# EAGLE board source_eagle (EAGLE 9.2.0)
REV: B
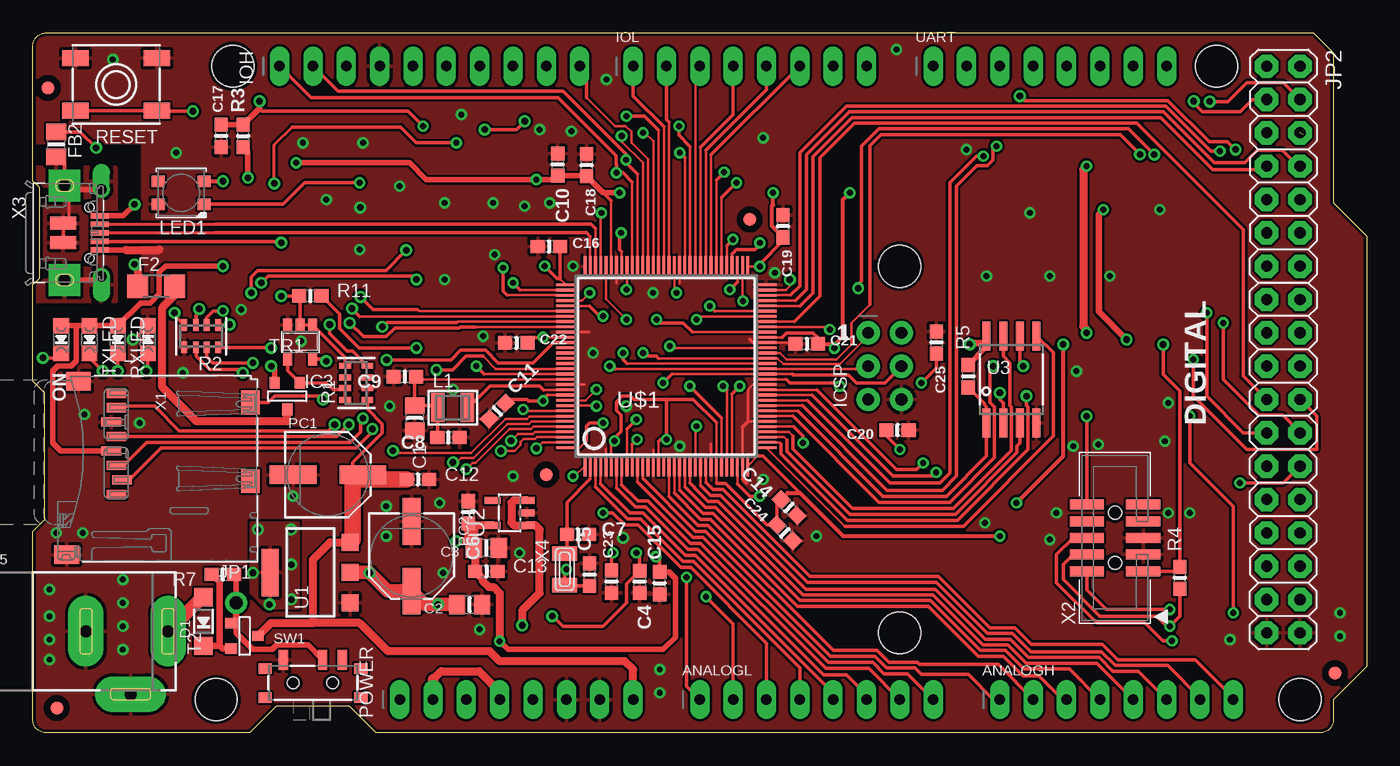
[diagram p0: board, top side]
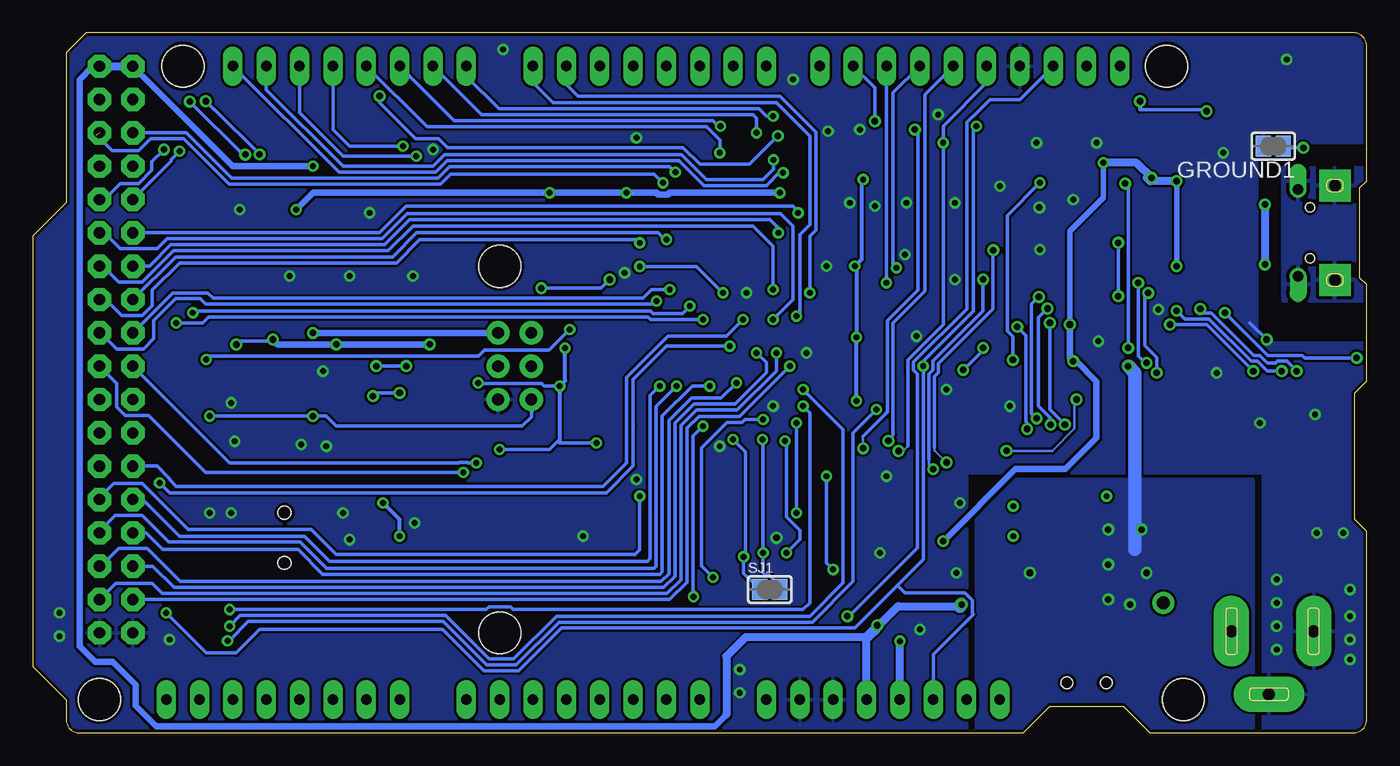
[diagram p1: board, bottom side, seen from below]

Size 101.6 x 53.34 mm. Coordinates in mm from the lower left corner, seen from the top.
Outline: 97.54,53.34 99.06,51.82 99.06,40.39 101.6,37.85 101.6,5.08 99.06,2.54 99.06,1 arc-90 98.06,0 26.16,0 24.13,2.03 18.54,2.03 16.51,0 1,0 arc-90 0,1 0,15.37 0.89,16.26 0.89,25.91 0,26.8 0,34.16 0.51,34.67 0.51,41.53 0,42.04 0,52.34 arc-90 1,53.34 97.54,53.34
Copper layers (1*16): Top 0.035mm / dielectric 1.5mm / Bottom 0.035mm
Design rules "adafruit *": minimum track width 7mil, minimum drill 15.5mil, track to track 7mil, track to pad 7mil, pad to pad 7mil, via to via 7mil, smd to smd 7mil, copper to edge 10mil, drill to drill 8mil, minimum pad ring 10mil, minimum via ring 8mil, stop-mask expansion 2mil, vias tented up to drill 20mil, thermal gap 10mil
Holes 3.2 mm at 66.04,35.56 66.04,7.62 15.24,50.8 13.97,2.54 96.52,2.54 90.17,50.8

## Footprints (pad centres in the part's own frame; a part is rotated, then mirrored left to right if it is on the bottom)
1X08_OVALWAVE = drill 0.8 pad 1.5 long: 1 -8.89,0; 2 -6.35,0; 3 -3.81,0; 4 -1.27,0; 5 1.27,0; 6 3.81,0; 7 6.35,0; 8 8.89,0
0805-NO = smd 1.24 x 1.5: 1 -0.95,0; 2 0.95,0
0603-NO = smd 1.075 x 1: 1 -0.85,0; 2 0.85,0
SOD-123 = smd 1.4 x 1.4: A 1.85,0; C -1.85,0
R1206 = smd 1.6 x 1.803: 1 -1.422,0; 2 1.422,0
FIDUCIAL_1MM = smd 1 x 1: 1 0,0
SOLDERJUMPER_CLOSEDWIRE = smd 1.168 x 1.6: 1 -0.762,0; 2 0.762,0 | smd 0.635 x 0.203: WIRE 0,0
SOT23-5 = smd 0.69 x 0.99: 1 -0.95,-1.29; 2 0,-1.29; 3 0.95,-1.29; 4 0.95,1.3; 5 -0.95,1.3
2X03_ROUND_70MIL = drill 0.9 pad 1.778: 1 -2.54,-1.27; 2 -2.54,1.27; 3 0,-1.27; 4 0,1.27; 5 2.54,-1.27; 6 2.54,1.27
1X10_OVALWAVE = drill 0.8 pad 1.5 long: 1 -11.43,0; 2 -8.89,0; 3 -6.35,0; 4 -3.81,0; 5 -1.27,0; 6 1.27,0; 7 3.81,0; 8 6.35,0; 9 8.89,0; 10 11.43,0
1X01_ROUND = drill 1 pad 1.676: 1 0,0
2X18_THICKWAVE = drill 0.85 pad 1.778 octagon: 1 -21.59,-1.27; 2 -21.59,1.27; 3 -19.05,-1.27; 4 -19.05,1.27; 5 -16.51,-1.27; 6 -16.51,1.27; 7 -13.97,-1.27; 8 -13.97,1.27; 9 -11.43,-1.27; 10 -11.43,1.27; 11 -8.89,-1.27; 12 -8.89,1.27; 13 -6.35,-1.27; 14 -6.35,1.27; 15 -3.81,-1.27; 16 -3.81,1.27; 17 -1.27,-1.27; 18 -1.27,1.27; 19 1.27,-1.27; 20 1.27,1.27; 21 3.81,-1.27; 22 3.81,1.27; 23 6.35,-1.27; 24 6.35,1.27; 25 8.89,-1.27; 26 8.89,1.27; 27 11.43,-1.27; 28 11.43,1.27; 29 13.97,-1.27; 30 13.97,1.27; 31 16.51,-1.27; 32 16.51,1.27; 33 19.05,-1.27; 34 19.05,1.27; 35 21.59,-1.27; 36 21.59,1.27
CHIPLED_0805_NOOUTLINE = smd 1.2 x 1.2: A 0,-1.05; C 0,1.05
INDUCTOR_1007 = smd 1.016 x 2.2: P$1 -1.127,0; P$2 1.127,0
LED3535 = smd 1 x 0.85: 1 -1.75,0.875; 2 -1.75,-0.875; 3 1.75,-0.875; 4 1.75,0.875
PANASONIC_D = smd 3.556 x 1.4: + 2.654,0; - -2.654,0
RESPACK_4X0603 = smd 0.45 x 0.9: 1 -1.3,-0.85; 2 -0.4,-0.85; 3 0.4,-0.85; 4 1.3,-0.85; 5 1.3,0.85; 6 0.4,0.85; 7 -0.4,0.85; 8 -1.3,0.85
EVQ-Q2_SMALLER = smd 2 x 1.2: A -3.1,-2; A' 3.1,-2; B -3.1,2; B' 3.1,2
SPDT_SMT_SSSS811101 = smd 0.7 x 1.5: A -2.25,1.75; B 0.75,1.75; C 2.25,1.75 | smd 1 x 0.8: SUP1 -3.65,1.1; SUP2 -3.65,-1.1; SUP3 3.65,1.1; SUP4 3.65,-1.1 | hole 0.9: -1.5,0; 1.5,0
SOT-23 = smd 0.787 x 0.889: 1 0.025,-1.016; 2 -0.94,1.016; 3 0.991,1.016
SOT223-R = smd 1.3 x 1.3: 1 -2.3,-3.05; 2 0,-3.05; 3 2.3,-3.05 | smd 3.6 x 1.3: 4 0,3.05
SOT23-DBV = smd 0.55 x 1.2: 1 -0.95,-1.3; 2 0,-1.3; 3 0.95,-1.3; 4 0.95,1.3; 5 -0.95,1.3
SOIC8_208MIL = smd 0.6 x 2.2: 1 -1.905,-3.315; 2 -0.635,-3.315; 3 0.635,-3.315; 4 1.905,-3.315; 5 1.905,3.315; 6 0.635,3.315; 7 -0.635,3.315; 8 -1.905,3.315
SQFP-S-14X14-128 = smd 0.2 x 1.6: 1 -6.2,-7.6; 2 -5.8,-7.6; 3 -5.4,-7.6; 4 -5,-7.6; 5 -4.6,-7.6; 6 -4.2,-7.6; 7 -3.8,-7.6; 8 -3.4,-7.6; 9 -3,-7.6; 10 -2.6,-7.6; 11 -2.2,-7.6; 12 -1.8,-7.6; 13 -1.4,-7.6; 14 -1,-7.6; 15 -0.6,-7.6; 16 -0.2,-7.6; 17 0.2,-7.6; 18 0.6,-7.6; 19 1,-7.6; 20 1.4,-7.6; 21 1.8,-7.6; 22 2.2,-7.6; 23 2.6,-7.6; 24 3,-7.6; 25 3.4,-7.6; 26 3.8,-7.6; 27 4.2,-7.6; 28 4.6,-7.6; 29 5,-7.6; 30 5.4,-7.6; 31 5.8,-7.6; 32 6.2,-7.6; 65 6.2,7.6; 66 5.8,7.6; 67 5.4,7.6; 68 5,7.6; 69 4.6,7.6; 70 4.2,7.6; 71 3.8,7.6; 72 3.4,7.6; 73 3,7.6; 74 2.6,7.6; 75 2.2,7.6; 76 1.8,7.6; 77 1.4,7.6; 78 1,7.6; 79 0.6,7.6; 80 0.2,7.6; 81 -0.2,7.6; 82 -0.6,7.6; 83 -1,7.6; 84 -1.4,7.6; 85 -1.8,7.6; 86 -2.2,7.6; 87 -2.6,7.6; 88 -3,7.6; 89 -3.4,7.6; 90 -3.8,7.6; 91 -4.2,7.6; 92 -4.6,7.6; 93 -5,7.6; 94 -5.4,7.6; 95 -5.8,7.6; 96 -6.2,7.6 | smd 1.6 x 0.2: 33 7.6,-6.2; 34 7.6,-5.8; 35 7.6,-5.4; 36 7.6,-5; 37 7.6,-4.6; 38 7.6,-4.2; 39 7.6,-3.8; 40 7.6,-3.4; 41 7.6,-3; 42 7.6,-2.6; 43 7.6,-2.2; 44 7.6,-1.8; 45 7.6,-1.4; 46 7.6,-1; 47 7.6,-0.6; 48 7.6,-0.2; 49 7.6,0.2; 50 7.6,0.6; 51 7.6,1; 52 7.6,1.4; 53 7.6,1.8; 54 7.6,2.2; 55 7.6,2.6; 56 7.6,3; 57 7.6,3.4; 58 7.6,3.8; 59 7.6,4.2; 60 7.6,4.6; 61 7.6,5; 62 7.6,5.4; 63 7.6,5.8; 64 7.6,6.2; 97 -7.6,6.2; 98 -7.6,5.8; 99 -7.6,5.4; 100 -7.6,5; 101 -7.6,4.6; 102 -7.6,4.2; 103 -7.6,3.8; 104 -7.6,3.4; 105 -7.6,3; 106 -7.6,2.6; 107 -7.6,2.2; 108 -7.6,1.8; 109 -7.6,1.4; 110 -7.6,1; 111 -7.6,0.6; 112 -7.6,0.2; 113 -7.6,-0.2; 114 -7.6,-0.6; 115 -7.6,-1; 116 -7.6,-1.4; 117 -7.6,-1.8; 118 -7.6,-2.2; 119 -7.6,-2.6; 120 -7.6,-3; 121 -7.6,-3.4; 122 -7.6,-3.8; 123 -7.6,-4.2; 124 -7.6,-4.6; 125 -7.6,-5; 126 -7.6,-5.4; 127 -7.6,-5.8; 128 -7.6,-6.2
MICROSD = smd 0.7 x 1.5: 1 9,-10.64; 2 7.9,-10.24; 3 6.8,-10.64; 4 5.7,-11.04; 5 4.6,-10.64; 6 3.5,-11.04; 7 2.4,-10.64; 8 1.3,-10.64 | smd 1.8 x 1.4: CD1 2,-0.44; CD2 8,-0.44 | smd 1.4 x 1.9: MT1 0.4,-13.54; MT2 13.6,-14.44
2X05_1.27MM_BOX_POSTS = smd 0.76 x 2.6: 1 -2.54,-2.15; 2 -2.54,2.15; 3 -1.27,-2.15; 4 -1.27,2.15; 5 0,-2.15; 6 0,2.15; 7 1.27,-2.15; 8 1.27,2.15; 9 2.54,-2.15; 10 2.54,2.15 | hole 1: -1.905,0; 1.905,0
4UCONN_20329_V2 = smd 1 x 2: BASE@1 -0.75,-2; BASE@2 0.75,-2 | smd 0.4 x 1.35: D+ 0,0.775; D- -0.65,0.775; GND 1.3,0.775; ID 0.65,0.775; VBUS -1.3,0.775 | drill 0.8 pad 1.143 offset: SPRT@1 -3.3,0.9; SPRT@2 3.3,0.9 | drill 0.9 pad 2.413 square: SPRT@3 -3.6,-1.9; SPRT@4 3.6,-1.9 | hole 0.7: -1.95,0; 1.95,0
XTAL3215 = smd 1.1 x 1.9: P$1 1.2,0; P$2 -1.2,0
DCJACK_2MM_PTH = drill 0.9 pad 2.7 long: GND 7.35,0; GNDBREAK 10.75,-4.8; PWR 13.6,0

## Placement (x,y rotation side)
ANALOGH  20610  [1X08_OVALWAVE]  82.55,2.54 0 top
ANALOGL  20610  [1X08_OVALWAVE]  59.69,2.54 0 top
C1  10uF  [0805-NO]  29.09,23.98 270 top
C2  10uF  [0805-NO]  33.27,9.78 180 top
C3  10uF  [0805-NO]  34.54,14.1 180 top
C4  .1u  [0603-NO]  46.23,11.51 270 top
C5  22pF  [0603-NO]  42.42,12.06 90 top
C6  .1u  [0603-NO]  33.17,16.8 270 top
C7  22pF  [0603-NO]  41.53,15.11 0 top
C8  .1u  [0603-NO]  31.67,22.5 180 top
C9  1uF  [0603-NO]  28.34,27.14 180 top
C10  .1u  [0603-NO]  39.98,43.3 270 top
C11  .1u  [0603-NO]  35.38,24.53 45 top
C12  0.1uF  [0603-NO]  29.34,19.3 0 top
C13  0.1uF  [0603-NO]  34.54,12.32 0 top
C14  .1u  [0603-NO]  57.6,17.17 135 top
C15  .1u  [0603-NO]  47.75,11.4 90 top
C16  .1u  [0603-NO]  39.32,37.06 0 top
C17  0.1uF  [0603-NO]  14.35,45.49 90 top
C18  .1u  [0603-NO]  42.19,43.26 270 top
C19  .1u  [0603-NO]  57.15,38.61 270 top
C20  .1u  [0603-NO]  65.86,23.06 180 top
C21  .1u  [0603-NO]  58.95,29.64 0 top
C22  .1u  [0603-NO]  36.83,29.72 0 top
C23  .1u  [0603-NO]  44.07,11.53 90 top
C24  .1u  [0603-NO]  57.28,15.24 135 top
C25  .1u  [0603-NO]  68.83,29.74 270 top
D1  MBR120  [SOD-123]  13,8.48 90 top
F2  500mA  [R1206]  9.4,34.04 0 top
FB2  FERRITE  [0805-NO]  1.78,44.83 270 top
FD1  FIDUCIAL_1MM  [FIDUCIAL_1MM]  1.14,49.15 0 top
FD2  FIDUCIAL_1MM  [FIDUCIAL_1MM]  99.18,4.55 0 top
FD3  FIDUCIAL_1MM  [FIDUCIAL_1MM]  1.82,1.89 0 top
FD4  FIDUCIAL_1MM  [FIDUCIAL_1MM]  39.12,19.68 0 top
FD5  FIDUCIAL_1MM  [FIDUCIAL_1MM]  54.61,39.12 0 top
GROUND1  [SOLDERJUMPER_CLOSEDWIRE]  7.11,44.7 180 bottom
IC3  74LVC1G125D  [SOT23-5]  20.37,29.79 180 top
ICSP  3x2 M  [2X03_ROUND_70MIL]  64.9,27.94 270 top
IOH  20611  [1X10_OVALWAVE]  30.23,50.8 0 top
IOL  20610  [1X08_OVALWAVE]  54.61,50.8 0 top
JP1  [1X01_ROUND]  15.49,9.91 0 top
JP2  [2X18_THICKWAVE]  95.25,29.21 270 top
L  RED  [CHIPLED_0805_NOOUTLINE]  8.76,29.97 0 top
L1  10uH  [INDUCTOR_1007]  31.98,24.79 0 top
LED1  WS2812B3535  [LED3535]  11.3,41.15 180 top
ON  GREEN  [CHIPLED_0805_NOOUTLINE]  2.16,29.97 180 top
PC1  47uF/25V  [PANASONIC_D]  22.48,19.66 0 top
PC2  47uF+/6.3V+  [PANASONIC_D]  28.85,13.46 270 top
POWER  20610  [1X08_OVALWAVE]  36.83,2.54 0 top
R1  100K  [RESPACK_4X0603]  24.64,26.67 90 top
R2  1K  [RESPACK_4X0603]  12.83,30.23 180 top
R3  10K  [0603-NO]  16.02,45.48 90 top
R4  1K  [0603-NO]  87.38,11.81 90 top
R5  10K  [0603-NO]  71.25,27.18 90 top
R7  10K  [0603-NO]  14.48,12.06 180 top
R11  330R  [0603-NO]  21.13,33.3 0 top
RESET  EVQQ 6mm  [EVQ-Q2_SMALLER]  6.35,49.4 180 top
RXLED  YELLOW  [CHIPLED_0805_NOOUTLINE]  6.48,29.97 180 top
SJ1  AREF_3V  [SOLDERJUMPER_CLOSEDWIRE]  45.47,10.92 0 bottom
SW1  [SPDT_SMT_SSSS811101]  21.34,3.81 0 top
T2  DMP3098L-7  [SOT-23]  16.13,7.37 90 top
TR1  DMP3098L-7  [SOT-23]  19.35,25.65 0 top
TXLED  YELLOW  [CHIPLED_0805_NOOUTLINE]  4.32,29.97 180 top
U1  NCP1117ST50T3G  [SOT223-R]  21.13,12.22 90 top
U2  AP2112K-3.3  [SOT23-DBV]  36.32,16.76 90 top
U3  GD25Q64  [SOIC8_208MIL]  74.55,26.92 0 top
U$1  SAMD51PXXA  [SQFP-S-14X14-128]  48.26,27.94 0 top
U$23  [GRANDCENTRAL_REVB-BOT]  101.6,0 0 bottom
U$30  [GRANDCENTRAL_REVB_TOP]  0,0 0 top
UART  20610  [1X08_OVALWAVE]  77.47,50.8 0 top
X1  microsd  [MICROSD]  17.02,27.18 270 top
X2  2x5 0.05" SWD  [2X05_1.27MM_BOX_POSTS]  82.42,14.86 90 top
X3  20329  [4UCONN_20329_V2]  4.32,38.1 270 top
X4  32.768  [XTAL3215]  40.51,12.45 270 top
X5  2.1mm  [DCJACK_2MM_PTH]  -3.3,7.75 0 top

## Library data of the parts
ANALOGH ANALOGL C1-C25 D1 FB2 GROUND1 ICSP IOH IOL JP1 JP2 L L1 LED1 ON PC1 PC2 POWER R1-R5 R7 R11 RESET RXLED SJ1 SW1 TXLED U1 U3 U$1 UART X1-X3 X5 = microbuilder
F2 = adafruit
FD1-FD5 = microbuilder; BOM: EXCLUDE
IC3 = 74xx-little-de
T2 = zetex; OC_FARNELL: unknown; OC_NEWARK: unknown
TR1 = Transistors; CASE: SOT23; MONTHLY_USAGE: _____; PART_NUMBER: PMV48XP; PRICE: _____; SUPPLIER: _____; TYPE: Transistor
U2 = SmartPrj
U$23 U$30 = metro_silks
X4 = adafruit2

## Nets
3.3V: C3.2 C6.2 C10.2 C11.2 C13.1 C14.2 C15.2 C16.2 C18.2 C19.2 C20.2 C21.2 C22.2 C23.2 C24.2 C25.2 IC3.5 LED1.2 ON.A POWER.2 POWER.4 R1.4 R3.1 R4.2 R5.2 RXLED.A SJ1.1 TXLED.A U2.5 U3.8 U$1.6 U$1.15 U$1.26 U$1.32 U$1.37 U$1.46 U$1.54 U$1.65 U$1.79 U$1.91 U$1.97 U$1.107 U$1.118 X1.4 X2.1
!RESET: C17.2 ICSP.5 POWER.3 R3.2 RESET.B RESET.B' U$1.114 X2.10
+5V [usbvcc]: C2.2 ICSP.2 JP2.1 JP2.2 PC2.+ POWER.5 TR1.2 U1.2 U1.4 U2.1 U2.3
A0: ANALOGL.1 U$1.9
A1: ANALOGL.2 U$1.22
A2: ANALOGL.3 U$1.128
A3: ANALOGL.4 U$1.3
A4: ANALOGL.5 U$1.4
A5: ANALOGL.6 U$1.7
A6: ANALOGL.7 U$1.8
A7: ANALOGL.8 U$1.11
A8: ANALOGH.1 U$1.12
A9: ANALOGH.2 U$1.17
A10: ANALOGH.3 U$1.18
A11: ANALOGH.4 U$1.19
A12: ANALOGH.5 U$1.20
A13: ANALOGH.6 U$1.21
A14: ANALOGH.7 U$1.23
A15: ANALOGH.8 U$1.24
AREF [aref]: C4.1 IOH.3 SJ1.2 U$1.10
D0: IOL.8 U$1.101
D1: IOL.7 U$1.100
D2: IOL.6 U$1.72
D3: IOL.5 U$1.73
D4: IOL.4 U$1.74
D5: IOL.3 U$1.75
D6: IOL.2 U$1.80
D7: IOL.1 U$1.81
D8: IOH.10 U$1.84
D9: IOH.9 U$1.127
D10: IOH.8 U$1.98
D11: IOH.7 U$1.99
D12: IOH.6 U$1.125
D13: IOH.5 R2.8 U$1.126
D22: JP2.3 U$1.51
D23: JP2.4 U$1.63
D44: JP2.25 U$1.55
D45: JP2.26 U$1.52
D46: JP2.27 U$1.29
D47: JP2.28 U$1.30
D48: JP2.29 U$1.27
D49: JP2.30 U$1.28
D+ [USB]: U$1.95 X3.D+
D- [USB]: U$1.94 X3.D-
FLASH_CS: R5.1 U3.1 U$1.40
FLASH_IO0: U3.5 U$1.33
FLASH_IO1: U3.2 U$1.34
FLASH_IO2: U3.3 U$1.35
FLASH_IO3: U3.7 U$1.36
FLASH_SCK: U3.6 U$1.39
GND [gnd]: C1.2 C2.1 C3.1 C4.2 C5.2 C6.1 C7.2 C8.1 C9.2 C10.1 C11.1 C12.2 C13.2 C14.1 C15.1 C16.1 C17.1 C18.1 C19.1 C20.1 C21.1 C22.1 C23.1 C24.1 C25.1 GROUND1.2 IC3.3 ICSP.6 IOH.4 JP2.35 JP2.36 L.C LED1.4 PC1.- PC2.- POWER.6 POWER.7 R1.2 R2.5 RESET.A RESET.A' SW1.A U1.1 U2.2 U3.4 U$1.5 U$1.14 U$1.25 U$1.31 U$1.38 U$1.45 U$1.53 U$1.64 U$1.78 U$1.90 U$1.96 U$1.106 U$1.116 X1.6 X1.MT1 X1.MT2 X2.3 X2.5 X3.GND X5.GND X5.GNDBREAK
MISO: ICSP.1 JP2.31 U$1.50
MOSI: ICSP.4 JP2.32 U$1.47
N$1: L.A R2.1
N$2: FB2.1 GROUND1.1
N$3: ON.C R2.4
N$4: L1.P$2 U$1.117
N$5: R2.2 RXLED.C
N$7: R2.3 TXLED.C
N$9: C5.1 U$1.1 X4.P$1
N$10: IC3.1 IC3.2 R1.5 R11.1 X3.ID
N$11: IC3.4 R1.7 R1.8 TR1.3
N$12: C7.1 U$1.2 X4.P$2
N$15: D1.C R7.2 T2.2
NEOPIX: LED1.1 U$1.108
PCC_CLK: JP2.9 U$1.62
PCC_D0: JP2.18 U$1.66
PCC_D1: JP2.17 U$1.67
PCC_D2: JP2.16 U$1.68
PCC_D3: JP2.15 U$1.69
PCC_D4: JP2.14 U$1.88
PCC_D5: JP2.13 U$1.89
PCC_D6: JP2.12 U$1.92
PCC_D7: JP2.11 U$1.93
PCC_D8: JP2.20 U$1.43
PCC_D9: JP2.19 U$1.44
PCC_D10: JP2.22 U$1.56
PCC_D11: JP2.21 U$1.57
PCC_D12: JP2.24 U$1.58
PCC_D13: JP2.23 U$1.59
PCC_DEN1: JP2.7 U$1.60
PCC_DEN2: JP2.8 U$1.61
PCC_XCLK: JP2.10 U$1.85
PWR_SWITCH: JP1.1 R7.1 SW1.B T2.3
PWRIN [USB]: D1.A X5.PWR
RXLED: R2.7 U$1.124
SCK: ICSP.3 JP2.33 U$1.48
SCL: IOH.1 U$1.87 UART.8
SCL_1: JP2.5 U$1.71
SD_CD: U$1.122 X1.CD1
SD_CS: U$1.104 X1.2
SD_MISO: U$1.105 X1.7
SD_MOSI: U$1.102 X1.3
SD_SCK: U$1.103 X1.5
SDA: IOH.2 U$1.86 UART.7
SDA_1: JP2.6 U$1.70
SS: JP2.34 U$1.49
SWCLK: R4.1 U$1.119 X2.4
SWDIO: U$1.120 X2.2
SWO: U$1.121 X2.6
TXLED: R2.6 U$1.123
UART1_RX: U$1.42 UART.6
UART1_TX: U$1.41 UART.5
UART2_RX: U$1.77 UART.4
UART2_TX: U$1.76 UART.3
UART3_RX: U$1.83 UART.2
UART3_TX: U$1.82 UART.1
USB_HOSTEN: R11.2 U$1.113
USBVCC [usbvcc]: F2.2 TR1.1
USHIELD [gnd]: FB2.2 X3.BASE@1 X3.BASE@2 X3.SPRT@1 X3.SPRT@2 X3.SPRT@3 X3.SPRT@4
VBUS: F2.1 X3.VBUS
VDDCORE: C1.1 C8.2 C9.1 L1.P$1 U$1.115
VIN [USB]: C12.1 PC1.+ POWER.8 R1.1 T2.1 U1.3

## Tracks (layer width: path | path; a pad name or v marks a point on that pad's centre or on a via)
3.3V  (via drill 0.45, 0.5)
  Top 0.178: 52.06,19.06 U$1.26 52.06,23.63 | U$1.15 47.66,22.19 | U$1.6 44.06,21.99 | U$1.46 57.39,26.94 | U$1.37 57.94,23.34 | U$1.65 v55.37,35.54 | U$1.107 v38.86,30.14 | U$1.91 44.06,40.54 | U$1.54 57.06,30.14 | U$1.79 48.86,33.69 | U$1.118 39.2,25.74 | U$1.32 55.2,21.08
  Top 0.203: U$1.97 40.6,34.14 40.17,34.58
  Top 0.254: 52.06,19.06 52.12,19 52.77,19 55.93,15.84 C24.2 56.68,17.45 C14.2 | C15.2 47.75,13.13 v47.46,13.42 | C23.2 44.07,13.59 v44.2,13.72 | 44.06,21.99 v44.31,22.24 44.31,22.47 44.79,22.95 44.79,24.24 44.45,24.58 44.45,25.21 44.9,25.65 44.95,25.65 44.96,25.65 45.53,25.65 45.78,25.4 48.26,25.4 | 57.39,26.94 57.66,26.67 61.21,26.67 v61.47,26.42 | 57.94,23.34 58.67,22.61 v58.67,22.1 | v38.86,30.14 38.1,30.14 C22.2 | 44.06,40.54 43.44,41.16 42.3,42.3 C18.2 | 57.06,30.14 57.4,30.48 59.44,30.48 59.8,30.11 C21.2 | 48.86,33.69 v49.02,33.53 | v38.99,35.56 39.94,34.61 40.17,34.61 | 39.2,25.74 38.86,25.4 v38.86,25.3 37.75,25.3 37.65,25.4 36.25,25.4 C11.2 | 52.06,23.63 50.29,25.4 48.26,25.4 | 47.66,22.19 47.82,22.35 v48.26,22.35 48.26,25.4 | 55.2,21.08 55.63,21.08 58.42,18.29 | 40.17,34.58 40.17,34.61 | 40.17,34.61 C16.2 | v55.37,35.54 55.37,35.73 57.15,37.5 C19.2 | X2.1 87.03,12.32 R4.2 87.38,26.04 86.11,27.3 v86.11,29.59 | R1.4 24.38,29.08 23.93,29.08 22.61,30.41 v22.61,31.11 | v22.35,28.32 22.18,28.49 IC3.5 | C20.2 65.01,22.62 v66.04,21.59 | v67.69,26.67 68.83,27.81 C25.2
  Top 0.305: LED1.2 13.07,42.04 v14.48,42.04 | v56.39,41.15 56.39,40.24 56.29,40.14 56.29,38.61 C19.2 | C21.2 60.96,29.64 | 60.96,29.64 61.14,29.64 61.72,30.23 61.72,40.64 v62.23,41.15 | v61.06,29.31 60.96,29.41 60.96,29.64 | C14.2 57.51,18.29 58.42,18.29 61.72,14.99 v73.66,14.99 | v78.49,29.59 78.49,21.08 v74.93,17.53
  Top 0.406: R3.1 16.38,44.27 v16.38,42.29 | v20.07,43.43 28.7,43.43 29.97,42.16 v38.35,42.16 39.7,42.16 C10.2 42.15,42.45 42.3,42.3 | C18.2 43.44,41.16 v44.7,41.16 v44.7,41.15 | C15.2 48.45,12.26 48.95,11.76 48.95,7.29 48.01,6.35 36.2,6.35 v35.56,6.99 | ON.A 3.3,31.02 | 3.3,31.02 TXLED.A RXLED.A 8.21,32.75 8.93,32.75 9.64,33.46 9.64,35.09 10.1,35.56 v14.48,35.56 | R5.2 72.64,29.43 72.64,29.72 U3.8 | X1.4 2.14,21.48 1.52,22.1 1.52,27.56 1.91,27.94 2.92,27.94 3.3,28.33 3.3,31.02
  Top 0.508: v71.37,29.59 71.5,29.72 72.64,29.72 | v83.31,29.97 81.18,32.1 81.18,39.53 v81.53,39.88
  Top 0.61: U2.5 33.31,15.81 | v35.56,6.99 35.56,10.64 35.09,11.11 34.74,11.11 34.27,11.58 34.27,11.74 C13.1 33.69,14 C3.2 33.59,15.53 C6.2 33.17,14.61 v32.26,14.61 | 30.48,4.06 31.11,4.7 34.01,4.7 35.56,3.15 POWER.4
  Top 0.813: 30.48,4.06 POWER.2
  Top 1.016: 33.31,15.81 C6.2
  Bottom 0.254: v61.47,26.42 62.66,26.42 62.87,26.62 67.64,26.62 v67.69,26.67 | 61.47,22.1 v58.67,22.1 | v49.02,33.53 51.03,35.54 v55.37,35.54 | v44.2,13.72 43.18,14.73 43.18,15.44 44.19,16.45 44.19,22.12 v44.31,22.24 | v48.26,22.35 47.33,21.42 47.33,13.55 v47.46,13.42 47.46,12.15 SJ1.1 | 61.47,22.35 62.23,21.59 v66.04,21.59 | v86.11,29.59 85.98,29.59 85.72,29.85 83.19,29.85
  Bottom 0.305: 16.76,42.29 v16.38,42.29 | v61.06,29.31 61.06,26.82 v61.47,26.42 61.47,22.35 61.47,22.1 | v38.35,42.16 38.48,42.04 38.48,36.07 v38.99,35.56 38.86,35.43 v38.86,30.14 v38.86,25.3 | v73.66,14.99 73.66,16.26 v74.93,17.53
  Bottom 0.406: v14.48,35.56 14.48,41.78 14.73,42.04 | v22.61,31.11 22.61,38.23 20.07,40.77 v20.07,43.43
  Bottom 0.508: v81.53,39.88 80.26,41.15 v62.23,41.15 v56.39,41.15 54.08,41.15 53.96,41.02 53.23,41.02 53.1,41.15 v44.7,41.15 | v71.37,29.59 v78.49,29.59 82.94,29.59 83.19,29.85 | v32.26,14.61 26.76,20.11 22.93,20.11 20.58,22.46 20.58,26.78 22.12,28.32 v22.35,28.32 22.61,28.57 v22.61,31.11
  Bottom 0.61: v14.48,42.04 14.73,42.04 16.51,42.04 16.76,42.29 | v16.38,42.29 17.53,43.43 v20.07,43.43 | POWER.4 v35.56,6.99
!RESET  (via drill 0.45, 0.5)
  Top 0.178: U$1.114 34.38,27.34
  Top 0.254: RESET.B' RESET.B 9.78,47.37 v12.19,47.37 | 34.38,27.34 v33.78,27.94 | v29.72,46.23 28.57,47.37 17.49,47.37 17.27,47.59 | v88.14,24.13 88.14,20.57 91.44,17.27 v91.44,9.14 | X2.10 80.27,24.12 v80.26,24.13
  Top 0.406: v17.27,48.13 17.27,47.59 R3.2 14.36,46.33 C17.2
  Bottom 0.254: v12.19,47.37 12.32,47.5 17.27,47.5 | v88.14,24.13 v80.26,24.13 79.25,24.13 78.49,23.37 64.33,23.37 63.63,24.07 ICSP.5 | v29.72,46.23 29.97,45.97 29.97,32.13 33.78,28.32 v33.78,27.94 33.78,13.21 35.75,11.24 | 35.75,11.24 38.99,8 61.32,8 64.59,4.72 67.24,4.72 70.39,7.87 84.33,7.87 86.11,6.1 88.39,6.1 v91.44,9.14 | POWER.3 33.02,5.97 29.97,9.02 30.05,9.09 30.05,10.12 30.6,10.67 35.18,10.67 35.75,11.24
  Bottom 0.305: v17.27,48.13 17.27,47.5
+5V  (via drill 0.45, 0.5)
  Top 0.406: TR1.2 18.41,27.69 v18.16,27.94
  Top 0.61: U2.3 36.64,17.71 36.45,17.53 36.45,16 36.64,15.81 U2.1 38.29,15.81 38.61,15.49 38.61,10.67 37.27,9.34 v37.27,8.19 | v80.26,43.18 80.01,42.93 80.01,30.99 80.26,30.73 v80.26,30.48
  Top 1.016: U1.2 25.63,12.22 v25.65,12.19 27.04,10.81 PC2.+ 29.88,9.78 v30.86,9.78 C2.2
  Bottom 0.508: JP2.1 86.36,43.18 v80.26,43.18 | JP2.2 97.03,50.8 98.04,49.78 98.04,6.6 96.85,5.41 95.52,5.41 93.78,3.67 93.78,2.08 92.2,0.51 49.65,0.51 48.77,1.39 | v80.26,30.48 ICSP.2
  Bottom 0.61: JP2.2 JP2.1 | POWER.5 38.1,7.37 v37.27,8.19 | v37.27,8.19 37.15,8.19 35.69,9.65 30.99,9.65 | 48.77,1.39 48.77,5.84 47.3,7.32 37.9,7.32 37.27,7.94 v37.27,8.19
  Bottom 1.016: 30.99,9.65 v30.86,9.78 | 17.65,13.97 17.65,27.43 v18.16,27.94
  other vias: 19.68,12.83 19.68,15.49 19.68,10.16 16.76,12.19 18.03,9.78 17.14,15.49
  pour Bottom: 8.64,19.3 29.72,19.3 29.72,0.25 8.64,0.25
  pour Top: 16.64,16 16.64,10.67 17.78,9.53 20.19,9.53 20.19,15.75 20.19,16
A0  (via drill 0.45)
  Top 0.178: U$1.9 45.26,23.16
  Top 0.254: v49.78,11.84 49.78,3.56 ANALOGL.1 | 45.26,23.16 v45.97,23.88
  Bottom 0.254: v49.78,11.84 50.67,12.73 50.67,21.72 48.72,23.67 47.57,23.67 47.36,23.88 v45.97,23.88
A1  (via drill 0.45)
  Top 0.178: U$1.22 50.46,23.28
  Top 0.254: 50.46,23.28 v50.55,23.37 | v51.27,10.37 53.34,8.3 ANALOGL.2
  Bottom 0.254: v50.55,23.37 51.31,22.61 51.31,10.41 v51.27,10.37
A2  (via drill 0.45)
  Top 0.178: U$1.128 41.68,21.74
  Top 0.203: 42.16,22.23 41.68,21.74
  Top 0.254: ANALOGL.3 55.88,6.83 50.12,12.6 49.35,12.6 46.12,15.84 45.1,15.84 44.17,16.76 v43.43,16.76 | 42.16,22.23 42.16,23.37 42.42,23.62 v43.43,23.62
  Bottom 0.254: v43.43,16.76 v43.43,23.62
A3
  Top 0.178: U$1.3 42.86,18.72
  Top 0.254: ANALOGL.4 58.42,4.94 50.3,13.06 49.54,13.06 46.31,16.29 45.29,16.29 42.86,18.72
A4
  Top 0.178: U$1.4 43.26,18.97
  Top 0.254: ANALOGL.5 60.96,3.05 50.49,13.51 49.73,13.51 46.5,16.75 45.48,16.75 43.26,18.97
A5
  Top 0.178: U$1.7 44.46,18.65
  Top 0.254: ANALOGL.6 63.5,2.89 61.96,4.43 60.23,4.43 50.68,13.97 49.92,13.97 46.69,17.21 45.9,17.21 44.46,18.65
A6
  Top 0.178: U$1.8 44.86,18.89
  Top 0.254: ANALOGL.7 63.68,4.9 60.4,4.9 50.87,14.43 50.11,14.43 46.87,17.66 46.09,17.66 44.86,18.89
A7
  Top 0.178: U$1.11 46.06,19.12
  Top 0.254: ANALOGL.8 66.62,4.5 64.84,4.5 63.98,5.36 60.59,5.36 51.06,14.88 50.3,14.88 46.06,19.12
A8
  Top 0.178: U$1.12 46.46,19.37
  Top 0.254: 46.46,19.37 50.49,15.34 51.25,15.34 60.75,5.84 64.14,5.84 65.02,4.95 67.18,4.95 67.69,4.45 71.25,4.45 73.15,2.54 ANALOGH.1
A9
  Top 0.178: U$1.17 48.46,18.02
  Top 0.254: 48.46,18.02 50.68,15.8 51.44,15.8 60.97,6.27 64.31,6.27 65.2,5.38 67.36,5.38 67.54,5.21 73.53,5.21 ANALOGH.2
A10
  Top 0.178: U$1.18 48.86,18.27
  Top 0.254: 48.86,18.27 50.87,16.26 51.63,16.26 58.23,9.65 68.2,9.65 72.01,5.84 73.91,5.84 75.41,4.34 76.64,4.34 78.44,2.54 ANALOGH.3
A11
  Top 0.178: U$1.19 49.26,18.51
  Top 0.254: 49.26,18.51 51.06,16.71 51.82,16.71 58.45,10.08 68.38,10.08 72.19,6.27 74.09,6.27 75.49,4.88 78.94,4.88 ANALOGH.4
A12
  Top 0.178: U$1.20 49.66,18.76
  Top 0.254: 49.66,18.76 51.25,17.17 52.01,17.17 58.66,10.52 68.56,10.52 72.37,6.71 74.27,6.71 75.67,5.31 81.05,5.31 ANALOGH.5
A13
  Top 0.178: U$1.21 50.06,19.03
  Top 0.254: 50.06,19.03 50.4,18.68 50.4,18.66 51.44,17.63 52.2,17.63 58.88,10.95 68.74,10.95 72.55,7.14 74.45,7.14 75.85,5.74 81.23,5.74 82.27,4.7 84.2,4.7 ANALOGH.6
A14
  Top 0.178: U$1.23 50.86,18.85
  Top 0.254: 50.86,18.85 51.63,18.09 52.39,18.09 58.99,11.48 68.81,11.48 72.72,7.57 74.63,7.57 76.03,6.17 81.41,6.17 82.45,5.13 86.44,5.13 88.9,2.67 ANALOGH.7
A15
  Top 0.178: U$1.24 51.26,19.1
  Top 0.254: 51.26,19.1 51.82,18.54 52.58,18.54 59.21,11.91 68.99,11.91 72.9,8 74.81,8 76.08,6.73 81.46,6.73 82.63,5.56 88.54,5.56 91.44,2.67 ANALOGH.8
AREF  (via drill 0.45, 0.5)
  Top 0.178: U$1.10 45.66,21.99
  Top 0.254: v45.97,13.72 46.23,13.46 C4.1 45.21,11.34 45.21,9.91 43.43,8.13 40.39,8.13 39.63,8.89 v39.56,8.89 | 45.66,21.99 v46.02,22.35
  Bottom 0.254: v46.02,22.35 45.97,22.31 v45.97,13.72 45.97,12.19 45.81,12.03 45.52,12.03 44.84,11.35 44.84,11.06 SJ1.2 | v39.56,8.89 39.43,8.89 34.21,14.1 34.21,27.34 34.52,27.64 34.52,28.24 30.45,32.31 30.45,46.53 30.02,46.96 30,46.96 28.7,48.26 26.42,48.26 IOH.3
D0  (via drill 0.45)
  Top 0.178: U$1.101 42.39,32.54
  Top 0.254: 42.39,32.54 43.18,31.75 v43.43,31.75
  Bottom 0.254: IOL.8 63.5,49.53 61.98,48.01 44.96,48.01 42.42,45.47 42.42,38.73 43.18,37.98 43.18,32.01 v43.43,31.75
D1  (via drill 0.45)
  Top 0.178: U$1.100 41.83,32.94 v42.42,33.53
  Bottom 0.254: IOL.7 60.96,49.4 60.07,48.51 44.7,48.51 41.96,45.77 41.96,38.3 42.42,37.85 v42.42,33.53
D2
  Top 0.178: U$1.72 51.66,44.04
  Top 0.254: 51.66,44.04 IOL.6
D3
  Top 0.178: U$1.73 51.26,44.4
  Top 0.254: 51.26,44.4 55.88,49.02 IOL.5
D4
  Top 0.178: U$1.74 50.86,44.64
  Top 0.254: IOL.4 53.34,47.12 50.86,44.64
D5
  Top 0.178: U$1.75 50.46,50.46
  Top 0.254: 50.46,50.46 IOL.3
D6
  Top 0.178: U$1.80 48.46,46.54
  Top 0.254: 48.46,46.54 48.26,46.74 IOL.2
D7
  Top 0.178: U$1.81 48.06,46.17
  Top 0.254: 48.06,46.17 45.72,48.51 IOL.1
D8
  Top 0.178: U$1.84 46.86,43.7
  Top 0.203: 46.86,43.7 45.59,44.98 45.59,45.79 45.16,46.22 44.34,46.22 42.16,48.4
  Top 0.254: IOH.10 42.16,50.29 42.16,48.4
D9  (via drill 0.5)
  Top 0.203: U$1.127 38.82,22.14 v38.35,21.67
  Top 0.254: v34.42,45.97 36.83,45.97 v37.47,46.61
  Bottom 0.203: v38.35,21.67 v38.36,21.68 38.36,22.6
  Bottom 0.254: 38.36,22.6 37.05,23.91 37.03,23.91 36.6,24.33 36.6,24.36 36.5,24.46 36.5,31.42 34.16,33.76 34.16,45.85 34.29,45.85 v34.42,45.97 | v37.47,46.61 37.47,49.15 IOH.9
D10  (via drill 0.45)
  Top 0.178: U$1.98 37.13,33.74
  Top 0.254: 37.13,33.74 v36.58,34.29
  Bottom 0.254: IOH.8 v36.58,34.29
D11  (via drill 0.45)
  Top 0.178: U$1.99 36.13,33.34
  Top 0.254: 36.13,33.34 35.81,33.66 v35.81,35.43
  Bottom 0.254: IOH.7 36.07,48.77 36.07,35.69 v35.81,35.43
D12  (via drill 0.5)
  Top 0.203: U$1.125 38.26,22.94 38.1,22.79 36.97,22.79 v36.43,22.25
  Bottom 0.203: v36.43,22.25 36.07,22.61 36.07,22.73
  Bottom 0.254: 36.07,22.73 36.07,31.24 33.66,33.65 33.66,48.64 IOH.6
D13  (via drill 0.45, 0.5)
  Top 0.203: U$1.126 38.4,22.54 38.26,22.41 37.39,22.41 37.16,22.17 37.16,21.94 36.7,21.48 v35.66,21.48
  Top 0.229: v18.39,41.86 18.39,44.81 19.74,46.15
  Top 0.254: 19.74,46.15 28.02,46.15 29.21,44.96 v32.26,44.96 | R2.8 18.12,29.38 v18.16,29.34
  Bottom 0.203: v35.66,21.48 35.29,21.48 34.92,21.84
  Bottom 0.254: IOH.5 28.96,49.53 32.26,46.23 v32.26,44.96 32.26,31.11 34.95,28.42 34.95,27.46 34.92,27.44 34.92,21.84 | v18.16,29.34 18.16,41.63 v18.39,41.86
D22  (via drill 0.5)
  Top 0.178: U$1.51 56.91,28.94 57.4,28.45 61.22,28.45 62.36,29.59 62.36,31.24 63.75,32.64
  Top 0.254: 63.75,32.64 63.75,44.73 64.62,45.59 82.82,45.59 v84.33,44.08 | v88.43,48.13 88.43,47.99 89.07,47.35 91.98,47.35 92.89,48.26 JP2.3
  Bottom 0.254: v84.33,44.08 87.77,47.51 87.77,47.48 v88.43,48.13
D23  (via drill 0.5)
  Top 0.178: U$1.63 57.36,33.74 57.91,34.29 v57.66,34.54
  Top 0.254: v62.87,33.88 62.87,34.16 63.12,34.42 63.12,44.7 64.44,46.02 83.46,46.02 v85.42,44.06 | JP2.4 95.25,49.53 92.46,49.53 91.04,48.11 v89.64,48.11
  Bottom 0.254: v57.66,34.54 58.32,33.88 v62.87,33.88 | v85.42,44.06 85.59,44.06 v89.64,48.11
D44  (via drill 0.45)
  Top 0.178: U$1.55 50.23,30.54
  Top 0.254: 50.23,30.54 49.53,31.24 47.75,31.24 v47.5,31.5
  Bottom 0.254: JP2.25 92.14,20.32 91.19,19.36 91.19,19.31 90.68,18.8 58.17,18.8 56.39,20.57 56.39,27.06 53.23,30.22 48.77,30.22 v47.5,31.5
D45  (via drill 0.45)
  Top 0.178: U$1.52 48.64,29.34
  Top 0.254: 48.64,29.34 v48.51,29.46 | v91.95,19.05 95.25,19.05 JP2.26
  Bottom 0.254: v48.51,29.46 53.34,29.46 55.88,26.92 55.88,23.37 55.88,20.32 57.91,18.29 91.19,18.29 v91.95,19.05
D46  (via drill 0.45)
  Top 0.178: U$1.29 53.26,25.83
  Top 0.254: 53.26,25.83 v53.85,26.42
  Bottom 0.254: JP2.27 93.22,17.78 90.42,14.99 80.9,14.99 78.99,13.08 54.77,13.08 54.57,13.28 54.57,25.69 v53.85,26.42
D47  (via drill 0.45)
  Top 0.178: U$1.30 53.66,18.98
  Top 0.254: v55.37,18.03 54.61,18.03 53.66,18.98
  Bottom 0.254: JP2.28 96.52,17.93 95.45,19 93.27,19 89.77,15.49 80.39,15.49 78.49,13.59 55.77,13.59 55.75,13.57 55.37,13.96 v55.37,18.03
D48  (via drill 0.45)
  Top 0.178: U$1.27 52.46,23.99
  Top 0.254: 52.46,23.99 v50.04,26.42
  Bottom 0.254: JP2.29 92.96,15.24 91.69,13.97 81.41,13.97 79.51,12.08 53.83,12.08 53.66,12.25 53.66,24.13 51.37,26.42 v50.04,26.42
D49  (via drill 0.45)
  Top 0.178: U$1.28 52.86,26.13
  Top 0.254: 52.86,26.13 v52.58,26.42
  Bottom 0.254: JP2.30 96.52,15.39 95.32,16.59 93.27,16.59 91.24,14.55 81.22,14.55 79.21,12.53 54.28,12.53 54.11,12.7 54.11,24.88 v52.58,26.42
D+
  Top 0.178: U$1.95 42.46,37.8
  Top 0.229: X3.D+ 13.89,38.1
  Top 0.254: 42.46,37.8 42.16,38.1 13.89,38.1
D-
  Top 0.178: U$1.94 42.86,38.42
  Top 0.229: X3.D- 13.95,38.75
  Top 0.254: 42.86,38.42 42.53,38.75 13.95,38.75
FLASH_CS
  Top 0.178: U$1.40 58.26,24.54
  Top 0.254: 58.26,24.54 64.77,18.03 69.6,18.03 72.64,21.08 U3.1 72.64,24.83 72.47,25.01 72.47,25.11 R5.1
FLASH_IO0
  Top 0.178: U$1.33 61.85,15.75
  Top 0.254: 61.85,15.75 70.87,15.75 77.72,22.61 77.72,28.97 U3.5
FLASH_IO1  (via drill 0.5)
  Top 0.178: U$1.34 56.85,22.14 56.99,22
  Top 0.254: 56.99,22 56.99,21.26 62.04,16.2 70.41,16.2 75.79,21.58 75.79,24.84 75.69,24.93 v75.69,25.65 | v73.66,25.91 73.66,25.4 73.91,25.15 U3.2
  Bottom 0.254: v75.69,25.65 75.44,25.91 v73.66,25.91
FLASH_IO2
  Top 0.178: U$1.35 57.22,22.54 57.45,22.31
  Top 0.254: 57.45,22.31 57.45,21.45 62.23,16.66 70.26,16.66 74.95,21.36 74.95,21.86 75.18,22.1 U3.3
FLASH_IO3
  Top 0.178: U$1.36 57.58,22.94 57.91,22.61
  Top 0.254: 57.91,22.61 57.91,21.63 62.42,17.12 70.1,17.12 74.52,21.53 74.52,24.84 74.42,24.93 74.42,28.19 73.91,28.7 U3.7
FLASH_SCK  (via drill 0.5)
  Top 0.178: U$1.39 57.9,24.14
  Top 0.254: 57.9,24.14 64.47,17.58 69.85,17.58 73.25,20.98 73.25,24.84 72.9,25.19 72.9,27.69 v73.15,27.94 | v75.44,27.94 75.18,28.2 U3.6
  Bottom 0.254: v73.15,27.94 v75.44,27.94
GND  (via drill 0.45, 0.5)
  Top 0.178: U$1.78 49.28,35.54 49.28,34.29 | U$1.90 44.45,34.29 | U$1.106 42.36,30.54 | U$1.116 42.03,26.54 | U$1.5 43.66,21.62 | U$1.14 47.26,21.57 | 54.06,19.35 U$1.31 54.06,23.33 | U$1.25 51.66,22 | U$1.38 54.47,23.74 | 54.84,29.74 U$1.53 58.01,29.74 | U$1.45 54.86,26.54
  Top 0.203: 54.47,23.74 54.47,26.08 54.53,26.13 54.53,26.21 54.86,26.54
  Top 0.254: 54.06,19.35 54.36,19.05 | 54.47,23.74 54.06,23.33 | 54.84,29.74 54.61,29.97 | 58.01,29.74 C21.1 | L.C 7.71,29.97 v7.62,29.97
  Top 0.406: X3.GND 7.09,36.8
  Top 0.61: 7.09,36.8 9.62,36.8 9.65,36.83
  Bottom 0.254: v7.62,29.97 8.89,31.24
  other vias: 24.94,40.03 72.64,34.8 77.47,34.8 82.04,34.8 75.95,39.62 85.85,39.88 55.63,45.34 71.12,44.45 42.67,28.96 47.24,33.53 45.21,24.89 55.63,19.3 49.28,21.84 59.69,14.99 56.52,35.05 91.19,7.11 38.61,45.97 32.64,47.12 22.35,40.64 25.15,44.96 20.57,44.96 44.96,14.86 99.57,7.37 99.57,9.14 41.15,35.56 39.37,40.39 24.89,36.83 27.94,41.66 10.92,44.2 3.94,24.26 8.13,23.62 34.04,7.87 31.24,12.19 26.92,17.27 26.92,14.99 30.99,17.53 19.81,18.03 37.08,13.72 36.58,19.56 32,26.16 27.18,24.89 34.29,30.23 11.43,27.43 6.1,51.31 1.78,15.24 3.81,15.24 6.86,6.35 6.86,8.13 6.86,9.91 6.86,11.68 1.27,5.59 1.27,7.11 1.27,8.89 1.27,10.92 47.75,4.83 47.75,3.05 43.69,49.78 65.79,52.07 88.14,16.76 20.45,29.84 15.88,32.26 86.49,16.76 77.98,16.76 77.47,14.73 72.52,16 86.23,22.23 81.15,21.97 79.25,21.84 79.5,27.56 86.49,25.15 41.02,45.85 37.47,40.13 31.37,40.39 35.05,40.39 35.18,36.45 31.37,34.54
  pour Bottom: 0,53.34 101.85,53.34 101.85,-0.25 30.48,0 30.48,19.81 7.87,19.81 7.87,0 0.25,0 0,29.72 8.38,29.72 8.38,44.96 0,44.96
  pour Top (rank 2): 0,53.34 101.85,53.34 101.85,-0.25 0,-0.25 0,29.72 8.38,29.72 8.38,44.96 0,44.96
MISO  (via drill 0.45)
  Top 0.178: 47.66,28.54 U$1.50 56.74,28.54 57.18,28.1 61.47,28.1 63.63,30.26 ICSP.1
  Top 0.254: 47.66,28.54 47.5,28.7 46.74,28.7 v46.48,28.96
  Bottom 0.254: JP2.31 92.46,12.7 90.83,11.07 53.54,11.07 52.68,11.94 52.68,23.6 51.24,25.04 48.13,25.04 45.73,27.44 45.73,28.21 v46.48,28.96
MOSI  (via drill 0.45)
  Top 0.178: 57.85,27.34 U$1.47 48.68,27.34
  Top 0.254: 57.85,27.34 57.91,27.28 62.12,27.28 62.74,26.67 64.9,26.67 ICSP.4 | 48.68,27.34 v48.01,26.67
  Bottom 0.254: JP2.32 96.41,12.7 95.07,14.05 92.89,14.05 90.38,11.53 53.73,11.53 53.14,12.13 53.14,23.79 51.43,25.5 49.18,25.5 v48.01,26.67
N$1  (via drill 0.5)
  Top 0.254: R2.1 14.95,31.08 v14.99,31.11 | v8.64,27.56 8.76,27.69 L.A
  Bottom 0.254: v14.99,31.11 12.19,31.11 v8.64,27.56
N$2  (via drill 0.5)
  Top 0.254: FB2.1 3.62,45.78 v4.83,44.58
  Bottom 0.254: v4.83,44.58 6.22,44.58 GROUND1.1
N$3  (via drill 0.5)
  Top 0.254: R2.4 10.79,31.81 v10.79,32.01 | v0.76,28.57 1.81,28.57 ON.C
  Bottom 0.254: v0.76,28.57 4.72,28.57 4.9,28.75 7.53,28.75 v10.79,32.01
N$4
  Top 0.178: U$1.117 38.88,26.14
  Top 0.254: L1.P$2 33.19,24.79 34.81,26.42 38.61,26.42 38.88,26.14
N$5  (via drill 0.5)
  Top 0.254: R2.2 13.23,31.66 13.72,32.16 v14.48,32.16 | v6.48,27.56 RXLED.C
  Bottom 0.254: v14.48,32.16 13.87,31.55 12.01,31.55 8.78,28.32 8.32,28.32 7.56,27.56 v6.48,27.56
N$7  (via drill 0.5)
  Top 0.254: R2.3 12.43,31.84 12.57,31.98 12.57,32.2 v12.67,32.3 | v5.33,27.56 4.32,28.57 TXLED.C
  Bottom 0.254: v12.67,32.3 12.34,31.98 11.83,31.98 8.6,28.75 8.14,28.75 7.59,28.19 6.91,28.19 6.79,28.32 6.09,28.32 v5.33,27.56
N$9  (via drill 0.45)
  Top 0.178: U$1.1 41.28,19.56
  Top 0.254: 41.28,19.56 v41.15,19.56 | v40.64,12.45 40.51,12.32 X4.P$1 40.54,11.21 C5.1
  Bottom 0.254: v41.15,19.56 41.15,12.95 v40.64,12.45
N$10  (via drill 0.5)
  Top 0.254: R1.5 23.79,28.62 IC3.1 IC3.2 20.37,33.21 R11.1 18.94,33.3 v18.92,33.27 | v18.92,37.34 18.81,37.45 X3.ID
  Bottom 0.254: v18.92,37.34 v18.92,33.27
N$11
  Top 0.254: R1.8 R1.7 23.68,26.16 22.86,26.16 22.35,26.67 TR1.3 19.42,27.59 IC3.4
N$12
  Top 0.178: U$1.2 42.46,19.35
  Top 0.254: 42.46,19.35 40.68,17.57 C7.1 40.68,13.81 X4.P$2
N$15
  Top 0.406: 14.22,11.47 R7.2
  Top 0.508: D1.C 14.22,6.63 | 14.22,11.47 14.22,6.63 | 14.22,6.63 14.43,6.43 T2.2
NEOPIX  (via drill 0.45, 0.5)
  Top 0.178: U$1.108 39.65,29.74
  Top 0.254: LED1.1 19.06,40.27 20.7,41.91 v24.89,41.91 | 39.65,29.74 38.1,28.2 35.44,28.2 34.48,29.16 32.57,29.16 31.84,28.42 v26.95,28.42
  Bottom 0.254: v26.95,28.42 26.95,30.2 27.37,30.63 27.37,39.43 v24.89,41.91
PCC_CLK  (via drill 0.45)
  Top 0.178: U$1.62 57.72,33.34
  Top 0.254: 57.72,33.34 58.42,34.04 58.42,44.2 61.98,47.75 86.29,47.75 89.72,44.32 v90.42,44.32
  Bottom 0.254: v90.42,44.32 91.06,43.69 91.06,43.56 JP2.9
PCC_D0  (via drill 0.45)
  Top 0.178: U$1.66 54.06,32.94
  Top 0.254: 54.06,32.94 v54.1,32.9
  Bottom 0.254: JP2.18 96.41,30.48 95.19,29.26 93.15,29.26 92.38,30.03 92.38,31.43 90.74,33.08 88.86,33.08 88.45,32.66 54.34,32.66 v54.1,32.9
PCC_D1  (via drill 0.45)
  Top 0.178: U$1.67 53.66,34.36
  Top 0.254: 53.66,34.36 v53.09,33.78
  Bottom 0.254: JP2.17 90.93,33.53 88.28,33.53 87.88,33.12 55.13,33.12 54.47,33.78 v53.09,33.78
PCC_D2  (via drill 0.45)
  Top 0.178: U$1.68 53.26,36.5
  Top 0.254: 53.26,36.5 53.59,36.83 54.99,36.83 55.44,37.27 v55.37,37.34
  Bottom 0.254: JP2.16 96.03,33.02 94.81,31.8 93.27,31.8 92.51,32.57 92.51,33.73 90.42,35.81 73.91,35.81 72.13,37.59 55.63,37.59 v55.37,37.34
PCC_D3  (via drill 0.45)
  Top 0.178: U$1.69 52.86,37.12
  Top 0.254: 52.86,37.12 v53.34,37.6
  Bottom 0.254: JP2.15 90.73,36.27 74.21,36.27 72.38,38.1 53.98,38.1 53.47,37.6 v53.34,37.6
PCC_D4  (via drill 0.45)
  Top 0.178: U$1.88 45.26,33.83
  Top 0.254: 45.26,33.83 v45.21,33.78
  Bottom 0.254: JP2.14 96.29,35.56 95.07,34.34 93.27,34.34 90.89,36.73 74.52,36.73 72.64,38.61 46.74,38.61 45.21,37.08 v45.21,33.78
PCC_D5  (via drill 0.45)
  Top 0.178: U$1.89 44.86,36.67
  Top 0.254: 44.86,36.67 44.7,36.83 44.7,37.99 v44.82,38.1
  Bottom 0.254: v44.82,38.1 44.82,38.45 45.47,39.1 72.89,39.1 74.81,37.19 91.08,37.19 92.71,35.56 JP2.13
PCC_D6  (via drill 0.45)
  Top 0.178: U$1.92 43.66,33.05 v45.21,31.5
  Bottom 0.254: JP2.12 96.16,38.1 94.94,36.88 92.13,36.88 91.37,37.64 75,37.64 73.08,39.55 44.63,39.55 43.69,38.61 43.69,33.02 v45.21,31.5
PCC_D7  (via drill 0.45)
  Top 0.178: U$1.93 43.26,39.58
  Top 0.254: v43.31,39.62 43.26,39.58
  Bottom 0.254: JP2.11 75.18,38.1 73.15,40.13 43.69,40.13 43.31,39.75 v43.31,39.62
PCC_D8  (via drill 0.45)
  Top 0.178: U$1.43 59.35,25.74
  Top 0.254: 59.35,25.74 65.53,19.56 68.52,19.56 v68.81,19.84
  Bottom 0.254: v68.81,19.84 88.42,19.84 92.76,24.18 94.56,24.18 95.2,24.82 95.2,26.62 JP2.20
PCC_D9  (via drill 0.45)
  Top 0.178: U$1.44 59.71,26.14
  Top 0.254: 59.71,26.14 65.79,20.07 67.31,20.07 v67.82,20.57
  Bottom 0.254: v67.82,20.57 68.47,20.57 68.49,20.6 69.12,20.6 69.14,20.57 86.61,20.57 JP2.19
PCC_D10  (via drill 0.45)
  Top 0.178: U$1.56 60.5,30.94
  Top 0.254: 60.5,30.94 v60.71,30.73 | JP2.22 97.79,24.13 97.79,21.59 92.46,21.59 88.39,25.65 v88.39,28.45
  Bottom 0.254: v60.71,30.73 62.28,29.16 67.18,29.16 67.64,28.7 88.14,28.7 v88.39,28.45
PCC_D11
  Top 0.178: U$1.57 58.01,31.34
  Top 0.254: 58.01,31.34 59.94,33.27 59.94,43.82 62.58,46.46 84.1,46.46 92.2,38.35 92.2,27.18 JP2.21
PCC_D12  (via drill 0.45)
  Top 0.178: U$1.58 50.79,31.74
  Top 0.254: 50.79,31.74 v50.55,31.5 | JP2.24 96.52,22.88 95.19,24.21 93.4,24.21 90.68,26.92 v90.68,31.24
  Bottom 0.254: v50.55,31.5 54.54,31.5 54.74,31.7 88.19,31.7 88.65,31.24 v90.68,31.24
PCC_D13  (via drill 0.45)
  Top 0.178: U$1.59 51.93,32.14
  Top 0.254: 51.93,32.14 v51.56,32.51 | v89.41,32 89.41,25.65 92.2,22.86 JP2.23
  Bottom 0.254: v51.56,32.51 52.12,31.95 54.35,31.95 54.55,32.16 89.26,32.16 v89.41,32
PCC_DEN1
  Top 0.178: U$1.60 58.45,32.54
  Top 0.254: 58.45,32.54 59.44,33.53 59.44,43.92 62.41,46.89 85.93,46.89 89.89,42.93 93.73,42.93 JP2.7
PCC_DEN2
  Top 0.178: U$1.61 58.09,32.94
  Top 0.254: 58.09,32.94 58.93,33.78 58.93,44.06 62.19,47.32 86.11,47.32 90,43.43 92.31,43.43 93.27,44.4 95.17,44.4 96.39,43.18 JP2.8
PCC_XCLK  (via drill 0.5)
  Top 0.178: U$1.85 46.46,43.46 44.85,45.06 v44.85,45.49
  Top 0.254: v91.61,44.44 91,45.06 89.59,45.06 86.47,48.18 75.51,48.18 v75.18,48.51
  Bottom 0.254: v44.85,45.49 47.02,43.32 50.8,43.32 52.07,44.59 70.02,44.59 70.7,45.27 72.45,45.27 75.18,48.01 v75.18,48.51 | JP2.10 96.17,40.64 94.96,41.86 93.54,41.86 92.53,42.87 92.53,43.52 v91.61,44.44
PWR_SWITCH
  Top 0.406: SW1.B 20.95,6.69 18.58,6.69 18.24,6.35 16.76,6.35 15.49,7.62 15.49,8.74 | JP1.1 15.49,11.9 R7.1
  Top 0.508: T2.3 15.49,8.74 JP1.1
PWRIN
  Top 1.016: X5.PWR 12.88,10.33 D1.A
RXLED  (via drill 0.5)
  Top 0.203: U$1.124 40.64,23.36 38.14,23.36 37.95,23.17 36.31,23.17 33.72,20.57 33.51,20.57 v33.02,20.09
  Top 0.254: v29.21,34.55 28.96,34.8 17.91,34.8 v17.4,34.29 | v16.76,28.19 13.72,28.19 13.23,28.68 R2.7
  Bottom 0.203: v33.02,20.09 33.35,20.42 33.35,20.83
  Bottom 0.254: 33.35,20.83 33.35,27.34 33.05,27.64 33.05,28.32 29.21,32.15 v29.21,34.55 | v17.4,34.29 17.4,28.7 16.76,28.07 v16.76,28.19
SCK  (via drill 0.45)
  Top 0.178: 62.68,27.74 U$1.48 44.4,27.74
  Top 0.254: v43.94,27.94 44.2,27.94 44.4,27.74 | 62.68,27.74 62.88,27.94 ICSP.3
  Bottom 0.254: JP2.33 53.09,10.16 51.77,11.48 51.77,23.22 50.86,24.13 47.76,24.13 v43.94,27.94
SCL  (via drill 0.45)
  Top 0.178: U$1.87 45.66,41.97
  Top 0.254: 45.66,41.97 44.96,42.67 v44.45,42.67 44.45,43.32 44.42,43.35 44.42,43.97 40.01,48.39 21.21,48.39 IOH.1
  Bottom 0.254: UART.8 78.28,42.72 70.93,42.72 70.03,43.62 52.39,43.62 50.48,41.71 45.72,41.71 44.76,42.67 v44.45,42.67
SCL_1  (via drill 0.45)
  Top 0.178: U$1.71 52.06,42.13
  Top 0.254: 52.06,42.13 v52.66,42.73
  Bottom 0.254: JP2.5 89.9,45.72 86.45,42.27 70.74,42.27 69.84,43.16 53.09,43.16 v52.66,42.73
SD_CD  (via drill 0.5)
  Top 0.203: v27.43,21.5 27.59,21.34 33.4,21.34 35.99,23.93 37.63,23.93 37.82,24.12 40.64,24.12 U$1.122
  Top 0.254: X1.CD1 17.94,25.18 18.41,25.65 21.84,25.65 v22.1,25.4
  Bottom 0.203: v22.1,25.4 22.25,25.24 22.25,23.19 23.95,21.5 v27.43,21.5
SD_CS  (via drill 0.5)
  Top 0.178: 32.36,31.34 U$1.104
  Top 0.203: 32.28,31.27 32.36,31.34
  Top 0.254: v25.86,23.16 25.86,22.97 24.61,21.71 9.78,21.71 7.34,19.28 X1.2 | v26.61,30.94 26.94,31.27 32.28,31.27
  Bottom 0.254: v25.86,23.16 25.86,23.62 25.96,23.71 25.96,30.29 v26.61,30.94
SD_MISO  (via drill 0.5)
  Top 0.178: U$1.105 33.73,30.94
  Top 0.254: 33.73,30.94 32.57,30.94 32.46,30.83 27.58,30.83 26.93,30.18 25.19,30.18 v24.13,31.24 | v22.99,23.5 22.5,23.01 11.15,23.01 9.27,24.89 6.49,24.89 X1.7
  Bottom 0.254: v24.13,31.24 24.13,24.64 v22.99,23.5
SD_MOSI  (via drill 0.5)
  Top 0.178: 29.43,32.14 U$1.102
  Top 0.203: 29.3,32.27 29.43,32.14
  Top 0.254: X1.3 6.92,20.38 8.68,22.15 24.18,22.15 24.96,22.93 24.96,23.78 v25.14,23.96 | v24.97,33.22 25.92,32.27 29.3,32.27
  Bottom 0.254: v25.14,23.96 25.53,24.35 25.53,32.66 v24.97,33.22
SD_SCK  (via drill 0.5)
  Top 0.203: U$1.103 24.91,31.74
  Top 0.254: X1.5 23.15,22.58 v24.07,23.5 | 24.91,31.74 v24.32,32.33
  Bottom 0.254: v24.07,23.5 24.07,23.97 25.02,24.91 25.02,31.64 v24.32,32.33
SDA  (via drill 0.45)
  Top 0.178: U$1.86 46.06,42.59
  Top 0.254: 46.06,42.59 45.18,43.46 v45.18,43.66 45.18,44.09 40.37,48.9 23.24,48.9 IOH.2
  Bottom 0.254: UART.7 83.82,49.02 77.98,43.18 71.12,43.18 70.23,44.07 52.2,44.07 50.29,42.16 45.97,42.16 45.18,42.95 v45.18,43.66
SDA_1  (via drill 0.45)  (1 unrouted)
  Top 0.178: U$1.70 52.46,40.78
  Top 0.254: 52.46,40.78 v53.59,41.91
  Bottom 0.254: 96.77,45.59 95.56,44.37 93.53,44.37 92.64,45.26 90.09,45.26 86.64,41.81 70.55,41.81 69.77,42.59 54.27,42.59 v53.59,41.91
SS  (via drill 0.45)
  Top 0.178: U$1.49 45.27,28.14
  Top 0.254: 45.27,28.14 44.96,28.45 v44.96,28.96
  Bottom 0.254: JP2.34 95.3,11.38 92.51,11.38 91.75,10.62 53.27,10.62 52.22,11.67 52.22,23.41 51.05,24.58 47.95,24.58 44.96,27.57 v44.96,28.96
SWCLK  (via drill 0.45)
  Top 0.178: U$1.119 42.1,25.34 v42.93,26.16
  Top 0.254: X2.4 79.25,13.59 78.49,12.83 78.49,11.68 81.28,8.89 85.6,8.89 86.36,8.13 v86.61,8.13 87.38,8.89 R4.1
  Bottom 0.254: v42.93,26.16 39.88,23.11 39.88,11.43 42.42,8.89 61.72,8.89 64.97,5.64 66.86,5.64 70.16,8.94 85.8,8.94 v86.61,8.13
SWDIO  (via drill 0.45)
  Top 0.178: U$1.120 42.88,24.94
  Top 0.254: 42.88,24.94 v42.93,24.89 | X2.2 80.27,10.91 81.79,9.4 v86.61,9.4
  Bottom 0.254: v86.61,9.4 67.06,9.4 66.86,9.6 65.22,9.6 65.02,9.4 42.93,9.4 42.42,9.91 42.42,24.38 v42.93,24.89
SWO  (via drill 0.45)
  Top 0.178: U$1.121 37.44,24.54
  Top 0.254: 37.44,24.54 v37.34,24.64 | X2.6 79.25,14.86 77.98,13.59 77.98,11.44 81.03,8.38 84.71,8.38 86.08,7.01 v86.77,7.01
  Bottom 0.254: v37.34,24.64 39.12,22.86 39.12,11.54 42.23,8.43 61.53,8.43 64.78,5.18 67.05,5.18 70.35,8.48 85.19,8.48 86.66,7.01 v86.77,7.01
TXLED  (via drill 0.5)
  Top 0.203: U$1.123 37.98,23.74 37.79,23.55 36.15,23.55 33.56,20.95 32.64,20.95 32.29,20.6 v32,20.6
  Top 0.254: v28.45,36.78 26.9,35.23 17.14,35.23 16.64,34.73 v16.64,33.52 | v15.99,27.44 15.74,27.69 13.46,27.69 12.43,28.72 R2.6
  Bottom 0.203: v32,20.6 32.92,21.52 32.92,21.76
  Bottom 0.254: 32.92,21.76 32.92,27.16 32.62,27.46 32.62,28.14 28.46,32.3 28.46,36.77 v28.45,36.78 | v16.64,33.52 16.89,33.27 16.89,29.52 15.99,28.62 v15.99,27.44
UART1_RX  (via drill 0.45)
  Top 0.178: U$1.42 58.99,25.34
  Top 0.254: 58.99,25.34 65.28,19.05 69.09,19.05 69.85,19.81 69.85,41.91 71.88,43.94 v72.39,43.94
  Bottom 0.254: UART.6 81.28,47.24 77.98,43.94 v72.39,43.94
UART1_TX  (via drill 0.45)
  Top 0.178: U$1.41 58.63,24.94
  Top 0.254: 58.63,24.94 65.08,18.49 69.29,18.49 70.36,19.56 70.36,41.66 71.91,43.21 72.69,43.21 73.12,43.64 73.12,44.42 v73.41,44.7
  Bottom 0.254: UART.5 78.74,45.97 77.47,44.7 v73.41,44.7
UART2_RX  (via drill 0.45)
  Top 0.178: U$1.77 49.66,43.81
  Top 0.254: 49.66,43.81 v49.28,44.2
  Bottom 0.254: UART.4 71.58,46.18 50.29,46.18 49.28,45.16 v49.28,44.2
UART2_TX  (via drill 0.45)
  Top 0.178: U$1.76 50.06,44.68
  Top 0.254: v49.22,46.23 49.22,45.52 50.06,44.68
  Bottom 0.254: UART.3 69.49,46.63 49.78,46.63 49.38,46.23 v49.22,46.23
UART3_RX  (via drill 0.45)
  Top 0.178: U$1.83 47.26,45.07
  Top 0.203: 47.26,45.07 46.61,45.72
  Top 0.254: v46.48,45.72 46.61,45.72
  Bottom 0.254: UART.2 67.41,47.09 46.74,47.09 46.48,46.84 v46.48,45.72
UART3_TX  (via drill 0.45)
  Top 0.203: 47.66,45.92 U$1.82
  Top 0.254: v45.21,46.99 46.59,46.99 47.66,45.92
  Bottom 0.254: UART.1 68.58,50.05 66.08,47.55 46.28,47.55 45.72,46.99 v45.21,46.99
USB_HOSTEN  (via drill 0.5)
  Top 0.178: 34.29,28.7 35.25,27.74 U$1.113
  Top 0.254: 34.29,28.7 33.02,28.7 31.98,27.66 v30.73,27.66 | R11.2 23.37,31.91 23.37,30.8 24.84,29.34 v29.21,29.34
  Bottom 0.254: v30.73,27.66 29.21,29.18 v29.21,29.34
USBVCC
  Top 0.61: F2.2 10.82,33.36 9.86,32.4 9.86,26.34 12.45,23.75 19.38,23.75 TR1.1
USHIELD
  Top 0.229: 2.72,41.4 2.72,39.25 X3.BASE@1 X3.BASE@2
  Top 0.254: FB2.2 2.42,43.88 X3.SPRT@3
  Top 0.406: X3.SPRT@2 4.92,34.5 X3.SPRT@4 | X3.SPRT@3 2.72,41.4 X3.SPRT@1
  pour Bottom (rank 3): 0.13,43.05 0.13,32.89 6.35,32.89 6.35,43.05
  pour Top (rank 2): 0.13,43.05 0.13,32.89 6.35,32.89 6.35,43.05
VBUS  (via drill 0.5)
  Top 0.406: X3.VBUS 6.89,39.4 v7.75,40.26
  Top 0.61: v7.75,35.69 7.98,35.46 F2.1
  Bottom 0.61: v7.75,40.26 v7.75,35.69
VDDCORE
  Top 0.178: U$1.115 29.39,26.94
  Top 0.254: C8.2 30.82,24.75 L1.P$1 30.71,24.93 C1.1 29.09,27.04 C9.1 29.39,26.94
VIN
  Top 0.254: R1.1 25.49,24.68 26.62,23.55 26.62,22.84 24.37,20.59 24.37,19.3 24.78,19.3 PC1.+
  Top 0.61: 21.34,8.38 18.14,8.38 T2.1 | 21.34,8.38 21.34,13.21 22.64,14.52 U1.3 | POWER.8 45.72,4.83 45.09,5.46 35.56,5.46 34.79,6.22 27.05,6.22 24.89,8.38 21.34,8.38
  Top 1.27: U1.3 24.37,14.71 24.37,19.3 C12.1

## Text on the board
tNames: 1 | 1 | DIGITAL
214bmp: D:/SmartProjects/Snc/a4_bn_logo2.bmp